# Altium PCB PCB1.PcbDoc (part 2 of 2)
Units mm, origin at the board's own origin, x right, y up, seen from the top; angles counter-clockwise.
Board outline 70 x 50 mm, 4 copper layers (Top Layer, Layer 1, Layer 2, Bottom Layer), stack 1.571 mm thick; 129 components, 87 nets, 486 pads, 124 vias.
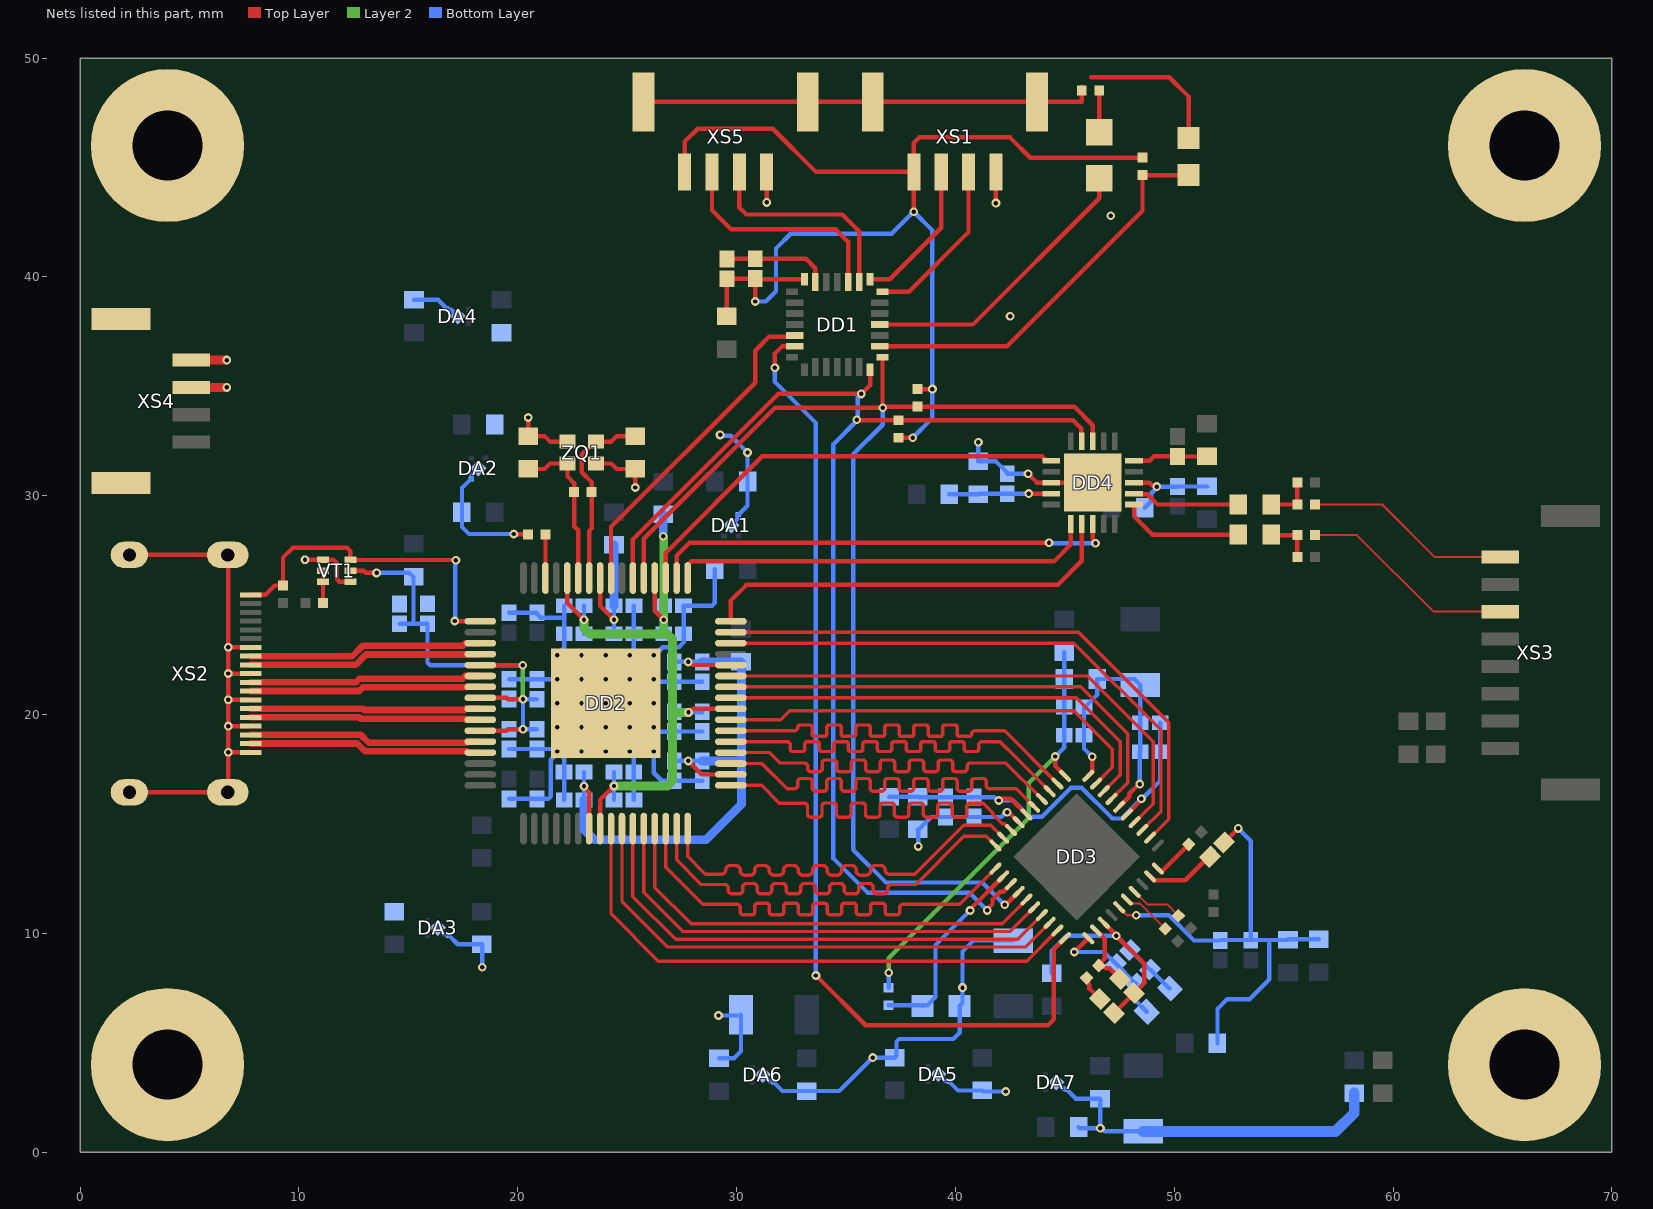
[diagram p4: the nets of this part, all layers, seen from the top]

## Via types
v1: diameter 0.4, hole 0.2, Top Layer to Bottom Layer, tented both sides, 80 vias
v2: diameter 0.5, hole 0.2, Top Layer to Bottom Layer, tented bottom, 41 vias
v3: diameter 0.4, hole 0.2, Top Layer to Bottom Layer, 3 vias

## Nets (pads, with @x,y where several pads share a name; then routed paths per layer and width w, separated by ;. In a path a pad name is that pad's centre, name@x,y a point inside that pad or via, vN(x,y) a via of type N, cw(c..) or ccw(c..) an arc to the next point about the centre after c; other vN are vias at no path point) (continued)
DGND1: C3.1 C4.1 C5.1 C6.1 C7.1 C8.1 C9.1 C10.1 C11.1 C12.1 C13.1 C14.1 C15.1 C16.1 C17.1 C18.1 C19.1 C20.1 C21.1 C22.1 C23.1 C24.1 C25.1 C26.1 C27.1 C28.1 C29.1 C30.1 C31.1 C32.1 C33.1 C34.1 C35.1 C36.1 C37.1 C38.1 C39.1 C40.1 C41.1 C42.1 C43.1 C44.1 C45.1 C46.1 C47.1 C48.1 C49.1 C50.1 C52.1 C53.1 C54.1 C56.1 C57.1 C58.1 C59.1 C61.1 C62.1 C67.1 C72.1 C75.1 C76.1 DA1.2 DA1.5 DA2.2 DA2.5 DA3.2 DA3.5 DA4.2 DA4.5 DA5.2 DA5.5 DA6.2 DA6.5 DA7.2 DA7.5 DD1.6 DD2.65 DD3.7 DD3.21 DD3.36 DD3.40 DD4.3 DD4.21 L14.2 pad.78 pad.80 R2.2 R6.1 SB1.1 SB2.1 VT1.1 VT1.4 XS1.1 XS1.M XS2.1 XS2.4 XS2.7 XS2.10 XS2.13 XS2.Shell XS4.1 XS4.2 XS4.M XS5.1 XS5.M ZQ1.2 ZQ1.4 | length 197.4
  Top Layer w0.2: XS2.Shell@2.25,16.449 XS2.Shell@6.75,16.449 6.775,16.474 pad.78@6.775,18.275 pad.78@6.775,19.475 pad.78@6.775,20.675 pad.78@6.775,21.875 ; XS2.Shell@2.25,27.299 XS2.Shell@6.75,27.299 6.775,27.274 pad.78@6.775,23.075 ; pad.78@6.775,18.274 XS2.1@7.799,18.274 ; pad.78@6.775,19.475 XS2.4@7.8,19.474 ; pad.78@6.775,20.675 XS2.7@7.799,20.675 ; XS2.10@7.8,21.874 pad.78@6.775,21.875 ; XS2.13@7.8,23.074 pad.78@6.775,23.075 ; pad.78@10.275,27.075 VT1.1@11.1,27.075 11.575,27.075 11.725,26.925 11.725,26.2 11.85,26.075 VT1.4@12.35,26.075 ; pad.78@19.825,28.25 19.837,28.238 20.462,28.238 R6.1@20.475,28.225 ; pad.78@20.475,33.575 C44.1@20.475,32.725 21.225,32.725 21.475,32.475 ZQ1.2@22.275,32.475 ; ZQ1.4@23.575,31.475 24.275,31.475 24.525,31.225 C40.1@25.375,31.225 pad.78@25.375,30.375 ; XS5.M@25.75,48 XS5.M@33.25,48 XS1.M@36.225,48 XS1.M@43.725,48 43.731,48.006 45.773,48.006 R2.2@45.773,48.698 ; C3.1@29.559,40.824 29.567,40.832 C10.1@30.85,40.832 30.857,40.825 33.169,40.825 33.6,40.394 DD1.6@33.6,39.768 ; v1(31.375,43.404) XS5.1@31.375,44.3 ; XS5.1@31.375,44.8 XS5.1@31.375,44.3 ; XS5.1@31.575,44.783 31.375,44.583 XS5.1@31.375,44.3 ; v1(41.85,43.375) XS1.1@41.85,44.8 ; v1(42.361,15.536) 42.399,15.498 42.476,15.498 DD3.7@42.89,15.083 ; v1(43.321,31.004) 43.725,30.6 DD4.3@44.383,30.6 DD4.21@46.275,30.6 ; v1(45.425,9.15) 45.434,9.15 46.068,9.784 DD3.21@46.072,9.78 ; DD3.40@46.072,17.204 46.249,17.381 v1(46.249,18.074) ; 46.2,49.125 49.775,49.125 50.655,48.245 SB1.1@50.655,46.354 ; DD3.36@47.486,15.79 47.946,16.25 47.946,16.379 48.392,16.825 v1(48.425,16.825) ; pad.78@6.775,21.875 pad.78@6.775,23.075
  Top Layer w0.4: XS4.2@5.075,34.95 v1(6.7,34.95) ; XS4.1@5.075,36.2 v1(6.7,36.2)
  Bottom Layer w0.2: C22.1@15.258,38.949 16.362,38.949 16.775,38.535 DA4.2@16.775,38.523 16.775,38.51 16.789,38.496 16.961,38.496 DA4.5@17.258,38.199 ; DA3.5@16.35,10.25 16.647,9.953 16.818,9.953 16.833,9.939 DA3.2@16.833,9.913 ; DA3.2@16.833,9.926 17.259,9.5 C21.1@18.35,9.5 ; DA2.5@18.201,31.253 17.905,30.956 17.905,30.785 17.89,30.771 17.865,30.771 17.451,30.357 C20.1@17.451,29.253 17.451,28.574 17.775,28.25 pad.78@19.825,28.25 ; v1(18.375,8.45) C21.1@18.375,9.475 ; C24.1@19.6,16.146 C31.1@20.875,16.146 21.394,16.146 21.511,16.264 21.511,17.932 21.813,18.233 v2(21.813,18.314) ; C6.1@19.6,18.425 C13.1@20.875,18.425 21.621,18.425 21.731,18.314 v2(21.813,18.314) ; C5.1@19.6,21.615 19.607,21.607 C12.1@20.875,21.607 20.882,21.614 v2(21.813,21.614) ; C30.1@19.6,24.65 20.871,24.65 C23.1@20.875,24.654 ; C23.1@20.875,24.607 21.054,24.428 22.121,24.428 ; v2(21.813,22.714) 21.813,22.755 22.121,23.064 22.121,24.428 ; C7.1@22.118,17.375 22.118,18.009 v2(21.813,18.314) ; C14.1@22.125,16.1 C7.1@22.125,17.346 ; C28.1@22.125,24.975 22.121,24.971 22.121,24.428 ; v2(25.113,18.314) 25.113,18.233 25.304,18.042 C32.1@25.304,17.375 25.304,16.104 C25.1@25.307,16.1 ; v2(25.113,22.714) 25.113,22.796 25.307,22.99 C36.1@25.307,23.7 C29.1@25.307,24.975 ; v2(26.213,18.314) 26.213,17.337 26.575,16.975 C8.1@27.15,16.975 C15.1@28.425,16.975 ; v2(26.213,19.414) 26.294,19.414 26.487,19.221 C33.1@27.15,19.221 27.154,19.225 C26.1@28.425,19.225 ; v2(26.213,21.614) 26.294,21.614 26.408,21.5 C9.1@27.15,21.5 C16.1@28.425,21.5 ; v2(26.213,22.714) 26.269,22.714 26.63,23.075 27.354,23.075 27.579,23.3 C34.1@27.579,23.7 C27.1@27.579,24.975 28.875,24.975 29,25.1 C75.1@29,26.65 ; v1(29.175,6.25) 30.176,6.25 C48.1@30.201,6.275 30.201,4.616 29.882,4.297 C38.1@29.2,4.297 ; v1(29.246,32.779) 29.284,32.741 29.734,32.741 v1(30.5,31.975) C76.1@30.5,30.65 30.5,29.546 30.087,29.133 30.061,29.133 30.047,29.118 30.047,28.947 DA1.5@29.75,28.65 ; DA6.5@31.2,3.547 31.497,3.25 31.668,3.25 31.683,3.236 31.683,3.21 32.096,2.797 C42.1@33.2,2.797 34.697,2.797 v1(36.225,4.325) 37.219,4.325 C37.1@37.222,4.322 37.308,4.408 37.308,5.058 37.425,5.175 39.9,5.175 40.194,5.469 SB2.1@40.194,6.69 40.325,6.821 v1(40.325,7.525) 40.325,9.175 40.824,9.674 C46.1@42.65,9.674 ; C52.1@38.275,14.75 38.3,14.725 v1(38.3,13.975) ; C52.1@38.325,14.75 38.896,15.321 C56.1@39.55,15.321 C61.1@40.85,15.321 42.092,15.321 42.307,15.536 v1(42.361,15.536) ; DA5.5@39.222,3.572 39.519,3.275 39.69,3.275 39.705,3.261 39.705,3.235 40.118,2.822 C41.1@41.222,2.822 41.269,2.775 v1(42.3,2.775) ; v1(41.05,32.45) C72.1@41.05,31.575 41.056,31.569 41.856,31.569 42.375,31.05 C67.1@42.375,31.004 v1(43.321,31.004) ; DA7.5@44.606,3.201 44.903,2.904 45.075,2.904 45.089,2.89 45.089,2.864 45.502,2.451 C43.1@46.606,2.451 46.625,2.432 v1(46.625,1.1) ; v1(45.425,9.15) 46.792,9.15 C59.1@47.334,8.609 48.234,7.709 C54.1@48.259,7.709 48.226,7.676 48.226,6.939 C50.1@48.745,6.42 ; C39.1@45.625,1.15 45.675,1.1 v1(46.625,1.1) ; v1(46.249,18.074) 45.879,18.444 C58.1@45.879,19.05 C53.1@45.879,20.35 45.925,20.35 46.475,20.9 C49.1@46.475,21.625 48.176,21.625 C45.1@48.45,21.351 C57.1@48.45,19.625 C62.1@48.45,18.3 48.425,18.275 v1(48.425,16.825) ; C47.1@48.575,0.951 46.828,0.951 46.679,1.1 v1(46.625,1.1)
  Bottom Layer w0.5: C47.1@48.575,0.951 57.376,0.951 58.225,1.8 L14.2@58.225,2.7
  other v2: 22.913,18.314 24.013,18.314 21.813,19.414 22.913,19.414 24.013,19.414 25.113,19.414 21.813,20.514 22.913,20.514 24.013,20.514 25.113,20.514 26.213,20.514 22.913,21.614 24.013,21.614 25.113,21.614 22.913,22.714 24.013,22.714
  other v3: 42.5,38.2 47.1,42.8
DVDD1: C25.2 C26.2 C27.2 C28.2 C32.2 C33.2 C34.2 C35.2 DD2.24 DD2.40 DD2.52 DD2.60 L7.1 | length 33.8
  Top Layer w0.2: DD2.60@22.263,26.239 22.263,25.102 v1(23.029,24.336) ; DD2.24@23.763,14.789 23.763,16.105 v1(24.396,16.739) ; DD2.52@26.263,26.239 26.263,24.746 v1(26.671,24.338) ; v1(27.802,20.1) 27.856,20.1 28.02,20.264 DD2.40@29.738,20.264
  Layer 2 w0.2: 26.625,23.684 26.671,23.73
  Layer 2 w0.4: v1(23.029,24.336) 23.029,23.946 23.291,23.684 26.625,23.684 26.841,23.684 27.075,23.449 27.075,20.1 ; v1(24.396,16.739) 26.841,16.739 27.075,16.974 27.075,20.1 ; v1(26.654,28.146) 26.671,28.129 v1(26.671,24.338) 26.671,23.73 ; v1(27.802,20.1) 27.075,20.1
  Bottom Layer w0.2: C35.2@23.029,23.7 v1(23.029,24.336) 23.029,24.971 C28.2@23.032,24.975 ; C32.2@24.396,17.375 v1(24.396,16.739) 24.396,16.104 C25.2@24.4,16.1 ; C34.2@26.671,23.7 v1(26.671,24.338) C27.2@26.671,24.975 ; C33.2@27.15,20.129 27.179,20.1 v1(27.802,20.1) 28.425,20.1 C26.2@28.425,20.132
  Bottom Layer w0.4: L7.1@26.65,29.15 26.654,29.146 v1(26.654,28.146)
DVDDIO1: C7.2 C8.2 C9.2 C14.2 C15.2 C16.2 DD2.23 DD2.34 DD2.44 L3.2 | length 29.6
  Top Layer w0.2: v1(23.029,16.727) 23.029,16.673 23.263,16.439 DD2.23@23.263,14.789 ; v1(27.787,17.882) 28.405,17.264 DD2.34@29.738,17.264 ; v1(27.787,22.407) 27.842,22.407 27.984,22.264 DD2.44@29.738,22.264
  Bottom Layer w0.2: C7.2@23.029,17.375 v1(23.029,16.727) 23.029,16.104 C14.2@23.032,16.1 ; C8.2@27.15,17.882 v1(27.787,17.882) C15.2@28.425,17.882 ; C9.2@27.15,22.407 v1(27.787,22.407) C16.2@28.425,22.407 ; 30.218,17.882 30.225,17.875
  Bottom Layer w0.4: C14.2@23.032,16.1 23.032,14.743 23.5,14.275 28.6,14.275 30.225,15.9 30.225,17.875 30.225,22.38 L3.2@30.197,22.407 C16.2@28.425,22.407 ; C15.2@28.425,17.882 30.218,17.882
"Hot Plug Detect / HEAC-": DD2.1 R7.2 VT1.6 XS2.19 | length 15.4
  Top Layer w0.2: XS2.19@7.8,25.474 8.474,25.474 8.9,25.9 R7.2@9.275,25.9 9.275,27.175 9.725,27.625 12.2,27.625 12.35,27.475 VT1.6@12.35,27.075 12.363,27.062 17.163,27.062 v1(17.175,27.05) ; v1(17.125,24.275) 17.13,24.27 18.282,24.27 DD2.1@18.288,24.264
  Bottom Layer w0.2: v1(17.125,24.275) 17.15,24.3 17.15,27.025 v1(17.175,27.05)
HS: DD2.46 DD3.33 | length 26.2
  Top Layer w0.154: DD2.46@29.738,23.264 45.417,23.264 49.397,19.284 49.397,15.58 DD3.33@48.547,14.729
I2C_SCL: DD1.22 DD2.53 DD3.14 DD4.18 R4.1 | length 57.7
  Top Layer w0.2: DD2.53@25.763,26.239 25.763,28.038 31.75,34.025 v1(36.675,34.025) ; DD1.22@36.67,36.325 36.67,34.117 36.724,34.063 R4.1@38.275,34.063 ; R4.1@38.275,34.075 45.425,34.075 46.275,33.225 DD4.18@46.275,32.492 ; v1(42.249,11.306) 42.295,11.306 DD3.14@42.89,11.901
  Bottom Layer w0.2: v1(36.675,34.025) 36.675,33.25 35.325,31.9 35.325,13.825 36.825,12.325 41.23,12.325 v1(42.249,11.306)
I2C_SDA: DD1.21 DD2.54 DD3.13 DD4.19 R3.1 | length 58.7
  Top Layer w0.2: DD2.54@25.263,26.239 25.263,28.013 31.904,34.654 v1(35.7,34.654) 36.1,35.054 DD1.21@36.1,35.755 ; v1(35.496,33.471) 35.521,33.446 45.379,33.446 45.748,33.077 45.748,32.519 DD4.19@45.775,32.492 ; v1(41.45,11.05) 41.45,11.104 41.695,11.349 41.695,11.553 42.046,11.904 42.186,11.904 DD3.13@42.537,12.255
  Bottom Layer w0.2: v1(35.496,33.471) 35.534,33.509 35.534,33.651 35.542,33.658 35.542,34.496 v1(35.7,34.654) ; v1@35.519,33.448 34.425,32.354 34.425,13.425 36,11.85 40.65,11.85 v1(41.45,11.05)
I2S: DD2.48 DD4.7 | length 19.4
  Top Layer w0.2: DD2.48@29.738,24.264 29.738,25.213 30.45,25.925 44.675,25.925 45.775,27.025 DD4.7@45.775,28.708
LED1: DD1.25 HL1.2 | length 13.3
  Top Layer w0.2: DD1.25@36.543,37.825 40.8,37.825 46.573,43.598 HL1.2@46.573,44.506
LLC: DD2.25 DD3.19 | length 25.8
  Top Layer w0.154: DD2.25@24.263,14.789 24.263,10.895 26.427,8.731 43.256,8.731 DD3.19@44.658,10.133
Lout: R16.2 XS3.6 | length 9.9
  Top Layer w0.09: R16.2@56.425,28.2 58.35,28.2 61.85,24.7 XS3.6@64.9,24.7
LRCLK: DD2.50 DD4.8 | length 21.3
  Top Layer w0.2: DD2.50@27.263,26.239 27.263,27.264 27.848,27.85 v1(44.275,27.85) ; DD4.8@46.275,28.708 46.275,28.004 46.4,27.879 v1(46.4,27.825)
  Bottom Layer w0.2: v1(44.275,27.85) 44.287,27.838 46.387,27.838 v1(46.4,27.825)
MCLK: DD2.51 DD4.1 | length 20.7
  Top Layer w0.2: DD2.51@26.763,26.239 26.763,27.388 31.177,31.802 43.959,31.802 44.076,31.685 44.076,31.627 44.103,31.6 DD4.1@44.383,31.6
MCU_VDD: C3.2 C10.2 DD1.7 L1.2 R1.1 R3.2 R4.2 XS1.4 XS5.4 | length 55.8
  Top Layer w0.2: XS5.4@27.625,44.8 27.625,46.175 28.225,46.775 31.65,46.775 33.625,44.8 XS1.4@38.1,44.8 ; L1.2@29.55,38.2 29.559,38.209 C3.2@29.559,39.917 29.567,39.925 C10.2@30.85,39.925 ; v1(30.85,38.875) C10.2@30.85,39.925 ; DD1.7@33.1,39.895 30.88,39.895 C10.2@30.85,39.925 ; R3.2@37.4,32.65 v1(38.05,32.65) ; v1(38.1,42.975) XS1.4@38.1,44.8 ; R4.2@38.275,34.875 v1(38.95,34.875) ; R1.1@48.55,45.45 43.425,45.45 42.5,46.375 38.35,46.375 38.1,46.125 XS1.4@38.1,44.8
  Bottom Layer w0.2: v1(30.85,38.875) 31.333,38.875 31.8,39.342 31.8,41.3 32.475,41.975 37.084,41.975 v1@38.084,42.975 ; v1(38.05,32.65) 38.95,33.55 v1(38.95,34.875) 38.95,42.125 v1(38.1,42.975)
NetC40_2: C40.2 DD2.58 R8.1 ZQ1.1 | length 8.7
  Top Layer w0.2: DD2.58@23.263,26.239 23.263,28.39 23.375,28.502 R8.1@23.375,30.175 23.375,30.625 22.925,31.075 22.925,31.875 23.525,32.475 ZQ1.1@23.575,32.475 24.275,32.475 24.525,32.725 C40.2@25.375,32.725
NetC44_2: C44.2 DD2.59 R8.2 ZQ1.3 | length 7.3
  Top Layer w0.2: C44.2@20.475,31.225 21.225,31.225 21.475,31.475 ZQ1.3@22.275,31.475 22.275,30.875 22.575,30.575 R8.2@22.575,30.175 22.575,28.612 22.763,28.424 DD2.59@22.763,26.239
NetC64_2: C64.2 DD3.29 | length 3.3
  Top Layer w0.2: DD3.29@48.901,12.608 49.084,12.425 50.5,12.425 51.579,13.504 C64.2@51.629,13.504
NetC65_1: C65.1 DD3.22 R10.1 | length 3.1
  Top Layer w0.2: DD3.22@46.426,10.133 46.819,9.74 46.819,8.849 46.564,8.593 R10.1@46.564,8.533 ; R10.1@46.558,8.533 46.735,8.533 46.864,8.403 47.047,8.403 C65.1@47.529,7.921
NetC66_1: C66.1 R10.2 | length 1.2
  Top Layer w0.2: R10.2@45.992,7.967 45.992,7.79 46.122,7.661 46.122,7.478 C66.1@46.604,6.996
NetC67_2: C67.2 C72.2 DD4.4 L13.1 | length 4.7
  Top Layer w0.2: v1(43.35,30.1) DD4.4@44.383,30.1
  Bottom Layer w0.2: L13.1@39.725,30.075 C72.2@41.05,30.075 41.071,30.096 C67.2@42.375,30.096 42.379,30.1 v1(43.35,30.1)
NetC68_1: C68.1 R16.1 R18.2 | length 2.2
  Top Layer w0.2: C68.1@54.425,28.225 54.45,28.2 R16.1@55.625,28.2 R18.2@55.625,27.2
NetC68_2: C68.2 DD4.11 | length 5.6
  Top Layer w0.2: DD4.11@48.167,29.6 48.167,29.058 49,28.225 C68.2@52.925,28.225
NetC69_1: C69.1 R17.1 R19.2 | length 2.2
  Top Layer w0.2: C69.1@54.425,29.6 R17.1@55.625,29.6 R19.2@55.625,30.6
NetC69_2: C69.2 DD4.12 | length 5
  Top Layer w0.2: DD4.12@48.167,30.1 48.194,30.073 48.763,30.073 49.236,29.6 C69.2@52.925,29.6
NetC70_1: C70.1 C73.1 DD4.15 | length 3.4
  Top Layer w0.2: DD4.15@48.167,31.6 48.874,31.6 49.074,31.8 50.146,31.8 C70.1@50.15,31.796 51.496,31.796 C73.1@51.5,31.8
NetC71_2: C71.2 C74.2 DD4.13 L12.1 | length 4.6
  Top Layer w0.2: DD4.13@48.167,30.6 48.874,30.6 49.016,30.457 49.162,30.457 v1(49.2,30.419)
  Bottom Layer w0.2: L12.1@48.65,29.45 48.95,29.75 48.95,30.115 49.2,30.365 v1(49.2,30.419) 50.144,30.419 C71.2@50.15,30.425 C74.2@51.5,30.425
NetDD3_12: DD3.12 R12.2 SB2.2 | length 9.1
  Top Layer w0.2: v1(40.671,11.046) 40.671,11.096 DD3.12@42.183,12.608
  Bottom Layer w0.2: R12.2@36.944,6.715 38.469,6.715 SB2.2@38.494,6.69 38.525,6.721 38.722,6.721 39.09,7.089 39.09,9.465 v1(40.671,11.046)
NetDD3_26: DD3.26 R11.2 | length 2.3
  Top Layer w0.09: DD3.26@47.84,11.547 48.017,11.371 48.429,11.371 R11.2@49.592,10.208
NetDD3_27: DD3.27 R14.2 | length 2.5
  Top Layer w0.09: DD3.27@48.193,11.901 48.769,11.325 49.675,11.325 R14.2@50.192,10.808
NetDD3_30: DD3.30 R9.1 | length 2
  Top Layer w0.2: DD3.30@49.254,12.962 49.408,12.808 R9.1@50.667,14.067
NetHL1_1: HL1.1 R2.1 | length 1.9
  Top Layer w0.2: HL1.1@46.573,46.606 R2.1@46.573,48.53
NetR5_1: R5.1 VT1.2 VT1.3 | length 1.5
  Top Layer w0.2: R5.1@11.1,25.1 VT1.3@11.1,26.075 VT1.2@11.1,26.575
P0: DD2.43 DD3.34 | length 24.6
  Top Layer w0.154: DD2.43@29.738,21.764 46.032,21.764 49.044,18.753 49.044,15.933 DD3.34@48.193,15.083
P1: DD2.42 DD3.37 | length 22.3
  Top Layer w0.154: DD2.42@29.738,21.264 45.737,21.264 47.88,19.121 47.88,16.891 DD3.37@47.133,16.144
P2: DD2.41 DD3.38 | length 21.2
  Top Layer w0.154: DD2.41@29.738,20.764 45.53,20.764 47.526,18.768 47.526,17.244 DD3.38@46.779,16.497
P3: DD2.39 DD3.39 | length 20.2
  Top Layer w0.154: DD2.39@29.738,19.764 32.028,19.764 32.435,20.172 45.415,20.172 47.173,18.414 47.173,17.598 DD3.39@46.426,16.851
P4: DD2.38 DD3.2 | length 20.9
  Top Layer w0.154: DD2.38@29.738,19.264 32.567,19.264 32.644,19.264 ccw(c32.644,19.418) 32.798,19.418 32.798,19.422 cw(c32.898,19.422) 32.898,19.522 33.361,19.522 cw(c33.361,19.422) 33.46,19.422 33.46,19.107 ccw(c33.56,19.107) 33.56,19.007 34.023,19.007 ccw(c34.023,19.107) 34.122,19.107 34.122,19.422 cw(c34.222,19.422) 34.222,19.522 34.685,19.522 cw(c34.685,19.422) 34.784,19.422 34.784,19.107 ccw(c34.884,19.107) 34.884,19.007 35.347,19.007 ccw(c35.347,19.107) 35.446,19.107 35.446,19.422 cw(c35.546,19.422) 35.546,19.522 36.009,19.522 cw(c36.009,19.422) 36.108,19.422 36.108,19.107 ccw(c36.208,19.107) 36.208,19.007 36.671,19.007 ccw(c36.671,19.107) 36.77,19.107 36.77,19.422 cw(c36.87,19.422) 36.87,19.522 37.333,19.522 cw(c37.333,19.422) 37.432,19.422 37.432,19.107 ccw(c37.532,19.107) 37.532,19.007 37.995,19.007 ccw(c37.995,19.107) 38.094,19.107 38.094,19.422 cw(c38.193,19.422) 38.193,19.522 38.657,19.522 cw(c38.657,19.422) 38.756,19.422 38.756,19.107 ccw(c38.855,19.107) 38.855,19.007 39.319,19.007 ccw(c39.319,19.107) 39.418,19.107 39.418,19.422 cw(c39.517,19.422) 39.517,19.522 39.981,19.522 cw(c39.981,19.422) 40.08,19.422 40.08,19.107 ccw(c40.179,19.107) 40.179,19.007 40.643,19.007 ccw(c40.643,19.107) 40.742,19.107 40.742,19.11 cw(c40.896,19.11) 40.896,19.264 41.3,19.264 42.244,19.264 DD3.2@44.658,16.851
P5: DD2.37 DD3.3 | length 20.5
  Top Layer w0.154: DD2.37@29.738,18.764 31.567,18.764 32.306,18.764 cw(c32.306,18.61) 32.46,18.61 32.46,18.415 ccw(c32.559,18.415) 32.559,18.316 33.023,18.316 ccw(c33.023,18.415) 33.122,18.415 33.122,18.665 cw(c33.221,18.665) 33.221,18.764 33.685,18.764 cw(c33.685,18.665) 33.784,18.665 33.784,18.415 ccw(c33.883,18.415) 33.883,18.316 34.346,18.316 ccw(c34.346,18.415) 34.446,18.415 34.446,18.665 cw(c34.545,18.665) 34.545,18.764 35.008,18.764 cw(c35.008,18.665) 35.108,18.665 35.108,18.415 ccw(c35.207,18.415) 35.207,18.316 35.67,18.316 ccw(c35.67,18.415) 35.77,18.415 35.77,18.665 cw(c35.869,18.665) 35.869,18.764 36.332,18.764 cw(c36.332,18.665) 36.432,18.665 36.432,18.415 ccw(c36.531,18.415) 36.531,18.316 36.994,18.316 ccw(c36.994,18.415) 37.094,18.415 37.094,18.665 cw(c37.193,18.665) 37.193,18.764 37.656,18.764 cw(c37.656,18.665) 37.756,18.665 37.756,18.415 ccw(c37.855,18.415) 37.855,18.316 38.318,18.316 ccw(c38.318,18.415) 38.418,18.415 38.418,18.665 cw(c38.517,18.665) 38.517,18.764 38.98,18.764 cw(c38.98,18.665) 39.08,18.665 39.08,18.415 ccw(c39.179,18.415) 39.179,18.316 39.642,18.316 ccw(c39.642,18.415) 39.742,18.415 39.742,18.665 cw(c39.841,18.665) 39.841,18.764 40.304,18.764 cw(c40.304,18.665) 40.404,18.665 40.404,18.415 ccw(c40.503,18.415) 40.503,18.316 40.966,18.316 ccw(c40.966,18.415) 41.066,18.415 41.066,18.61 cw(c41.22,18.61) 41.22,18.764 41.964,18.764 42.037,18.764 42.819,17.983 DD3.3@44.304,16.497
P6: DD2.36 DD3.4 | length 19.8
  Top Layer w0.154: DD2.36@29.738,18.264 31.524,18.264 32.004,17.785 32.359,17.785 33.098,17.785 cw(c33.098,17.631) 33.252,17.631 33.252,17.522 ccw(c33.385,17.522) 33.385,17.39 33.782,17.39 ccw(c33.782,17.522) 33.914,17.522 33.914,17.792 cw(c34.047,17.792) 34.047,17.924 34.444,17.924 cw(c34.444,17.792) 34.576,17.792 34.576,17.522 ccw(c34.709,17.522) 34.709,17.39 35.106,17.39 ccw(c35.106,17.522) 35.238,17.522 35.238,17.792 cw(c35.37,17.792) 35.37,17.924 35.768,17.924 cw(c35.768,17.792) 35.9,17.792 35.9,17.522 ccw(c36.032,17.522) 36.032,17.39 36.43,17.39 ccw(c36.43,17.522) 36.562,17.522 36.562,17.792 cw(c36.694,17.792) 36.694,17.924 37.092,17.924 cw(c37.092,17.792) 37.224,17.792 37.224,17.522 ccw(c37.356,17.522) 37.356,17.39 37.754,17.39 ccw(c37.754,17.522) 37.886,17.522 37.886,17.792 cw(c38.018,17.792) 38.018,17.924 38.416,17.924 cw(c38.416,17.792) 38.548,17.792 38.548,17.522 ccw(c38.68,17.522) 38.68,17.39 39.078,17.39 ccw(c39.078,17.522) 39.21,17.522 39.21,17.792 cw(c39.342,17.792) 39.342,17.924 39.74,17.924 cw(c39.74,17.792) 39.872,17.792 39.872,17.522 ccw(c40.004,17.522) 40.004,17.39 40.402,17.39 ccw(c40.402,17.522) 40.534,17.522 40.534,17.631 cw(c40.688,17.631) 40.688,17.785 42.008,17.785 42.31,17.785 DD3.4@43.951,16.144
P7: DD2.35 DD3.5 | length 20.9
  Top Layer w0.154: DD2.35@29.738,17.764 31.16,17.764 32.308,16.616 32.566,16.616 32.643,16.616 ccw(c32.643,16.77) 32.797,16.77 32.797,16.946 cw(c32.929,16.946) 32.929,17.078 33.327,17.078 cw(c33.327,16.946) 33.459,16.946 33.459,16.633 ccw(c33.591,16.633) 33.591,16.5 33.989,16.5 ccw(c33.989,16.633) 34.121,16.633 34.121,16.946 cw(c34.253,16.946) 34.253,17.078 34.651,17.078 cw(c34.651,16.946) 34.783,16.946 34.783,16.633 ccw(c34.915,16.633) 34.915,16.5 35.312,16.5 ccw(c35.312,16.633) 35.445,16.633 35.445,16.946 cw(c35.577,16.946) 35.577,17.078 35.974,17.078 cw(c35.974,16.946) 36.107,16.946 36.107,16.633 ccw(c36.239,16.633) 36.239,16.5 36.636,16.5 ccw(c36.636,16.633) 36.769,16.633 36.769,16.946 cw(c36.901,16.946) 36.901,17.078 37.298,17.078 cw(c37.298,16.946) 37.431,16.946 37.431,16.633 ccw(c37.563,16.633) 37.563,16.5 37.96,16.5 ccw(c37.96,16.633) 38.093,16.633 38.093,16.946 cw(c38.225,16.946) 38.225,17.078 38.622,17.078 cw(c38.622,16.946) 38.755,16.946 38.755,16.633 ccw(c38.887,16.633) 38.887,16.5 39.284,16.5 ccw(c39.284,16.633) 39.417,16.633 39.417,16.946 cw(c39.549,16.946) 39.549,17.078 39.946,17.078 cw(c39.946,16.946) 40.079,16.946 40.079,16.633 ccw(c40.211,16.633) 40.211,16.5 40.608,16.5 ccw(c40.608,16.633) 40.741,16.633 40.741,16.946 cw(c40.873,16.946) 40.873,17.078 41.27,17.078 cw(c41.27,16.946) 41.403,16.946 41.403,16.77 ccw(c41.557,16.77) 41.557,16.616 42.015,16.616 42.771,16.616 DD3.5@43.597,15.79
P8: DD2.33 DD3.8 | length 20
  Top Layer w0.154: DD2.33@29.738,16.764 31.144,16.764 31.953,15.956 32.348,15.956 33.087,15.956 cw(c33.087,15.802) 33.241,15.802 33.241,15.449 ccw(c33.373,15.449) 33.373,15.317 33.771,15.317 ccw(c33.771,15.449) 33.903,15.449 33.903,15.825 cw(c34.035,15.825) 34.035,15.957 34.433,15.957 cw(c34.433,15.825) 34.565,15.825 34.565,15.449 ccw(c34.697,15.449) 34.697,15.317 35.095,15.317 ccw(c35.095,15.449) 35.227,15.449 35.227,15.825 cw(c35.359,15.825) 35.359,15.957 35.757,15.957 cw(c35.757,15.825) 35.889,15.825 35.889,15.449 ccw(c36.021,15.449) 36.021,15.317 36.419,15.317 ccw(c36.419,15.449) 36.551,15.449 36.551,15.825 cw(c36.683,15.825) 36.683,15.957 37.081,15.957 cw(c37.081,15.825) 37.213,15.825 37.213,15.449 ccw(c37.345,15.449) 37.345,15.317 37.743,15.317 ccw(c37.743,15.449) 37.875,15.449 37.875,15.825 cw(c38.007,15.825) 38.007,15.957 38.404,15.957 cw(c38.404,15.825) 38.537,15.825 38.537,15.449 ccw(c38.669,15.449) 38.669,15.317 39.066,15.317 ccw(c39.066,15.449) 39.199,15.449 39.199,15.825 cw(c39.331,15.825) 39.331,15.957 39.728,15.957 cw(c39.728,15.825) 39.861,15.825 39.861,15.449 ccw(c39.993,15.449) 39.993,15.317 40.39,15.317 ccw(c40.39,15.449) 40.523,15.449 40.523,15.802 cw(c40.677,15.802) 40.677,15.956 41.277,15.956 41.709,15.524 41.709,15.437 42.141,15.005 42.249,15.005 42.524,14.729 DD3.8@42.537,14.729
P9: DD2.32 DD3.9 | length 20.3
  Top Layer w0.154: DD2.32@27.763,14.789 27.763,13.517 28.481,12.798 28.575,12.705 29.305,12.705 ccw(c29.305,12.903) 29.504,12.903 ; 29.504,12.904 cw(c29.702,12.904) 29.702,13.103 29.967,13.103 cw(c29.967,12.904) 30.166,12.904 30.166,12.863 ccw(c30.364,12.863) 30.364,12.665 30.629,12.665 ccw(c30.629,12.863) 30.828,12.863 30.828,12.904 cw(c31.026,12.904) 31.026,13.103 31.291,13.103 cw(c31.291,12.904) 31.49,12.904 31.49,12.863 ccw(c31.688,12.863) 31.688,12.665 31.953,12.665 ccw(c31.953,12.863) 32.152,12.863 32.152,12.904 cw(c32.35,12.904) 32.35,13.103 32.615,13.103 cw(c32.615,12.904) 32.814,12.904 32.814,12.863 ccw(c33.012,12.863) 33.012,12.665 33.277,12.665 ccw(c33.277,12.863) 33.476,12.863 33.476,12.904 cw(c33.674,12.904) 33.674,13.103 33.939,13.103 cw(c33.939,12.904) 34.138,12.904 34.138,12.863 ccw(c34.336,12.863) 34.336,12.665 34.601,12.665 ccw(c34.601,12.863) 34.8,12.863 34.8,12.904 cw(c34.998,12.904) 34.998,13.103 35.263,13.103 cw(c35.263,12.904) 35.462,12.904 35.462,12.863 ccw(c35.66,12.863) 35.66,12.665 35.925,12.665 ccw(c35.925,12.863) 36.124,12.863 36.124,12.904 cw(c36.322,12.904) 36.322,13.103 36.587,13.103 cw(c36.587,12.904) 36.786,12.904 ; 36.786,12.903 ccw(c36.984,12.903) 36.984,12.705 37.723,12.705 38.15,12.705 40.386,14.94 41.619,14.94 DD3.9@42.183,14.376
P10: DD2.31 DD3.10 | length 21.4
  Top Layer w0.154: DD2.31@27.263,14.789 27.263,13.365 28.394,12.233 28.824,12.233 29.453,12.233 cw(c29.453,12.068) 29.619,12.068 29.619,11.973 ccw(c29.784,11.973) 29.784,11.807 30.115,11.807 ccw(c30.115,11.973) 30.281,11.973 30.281,12.114 cw(c30.446,12.114) 30.446,12.279 30.777,12.279 cw(c30.777,12.114) 30.943,12.114 30.943,11.973 ccw(c31.108,11.973) 31.108,11.807 31.439,11.807 ccw(c31.439,11.973) 31.605,11.973 31.605,12.114 cw(c31.77,12.114) 31.77,12.279 32.101,12.279 cw(c32.101,12.114) 32.267,12.114 32.267,11.973 ccw(c32.432,11.973) 32.432,11.807 32.763,11.807 ccw(c32.763,11.973) 32.929,11.973 32.929,12.114 cw(c33.094,12.114) 33.094,12.279 33.425,12.279 cw(c33.425,12.114) 33.591,12.114 33.591,11.973 ccw(c33.756,11.973) 33.756,11.807 34.087,11.807 ccw(c34.087,11.973) 34.253,11.973 34.253,12.114 cw(c34.418,12.114) 34.418,12.279 34.749,12.279 cw(c34.749,12.114) 34.915,12.114 34.915,11.973 ccw(c35.08,11.973) 35.08,11.807 35.411,11.807 ccw(c35.411,11.973) 35.577,11.973 35.577,12.114 cw(c35.742,12.114) 35.742,12.279 36.073,12.279 cw(c36.073,12.114) 36.238,12.114 36.238,11.973 ccw(c36.404,11.973) 36.404,11.807 36.735,11.807 ccw(c36.735,11.973) 36.9,11.973 36.9,12.068 cw(c37.066,12.068) 37.066,12.233 37.143,12.233 38.179,12.233 40.386,14.44 41.412,14.44 DD3.10@41.829,14.022
P11: DD2.30 DD3.11 | length 23.1
  Top Layer w0.154: DD2.30@26.763,14.789 26.763,13.018 28.448,11.333 28.711,11.333 30.017,11.333 cw(c30.017,11.179) 30.171,11.179 30.171,10.984 ccw(c30.304,10.984) 30.304,10.852 30.701,10.852 ccw(c30.701,10.984) 30.833,10.984 30.833,11.25 cw(c30.966,11.25) 30.966,11.382 31.363,11.382 cw(c31.363,11.25) 31.495,11.25 31.495,10.984 ccw(c31.628,10.984) 31.628,10.852 32.025,10.852 ccw(c32.025,10.984) 32.157,10.984 32.157,11.25 cw(c32.289,11.25) 32.289,11.382 32.687,11.382 cw(c32.687,11.25) 32.819,11.25 32.819,10.984 ccw(c32.951,10.984) 32.951,10.852 33.349,10.852 ccw(c33.349,10.984) 33.481,10.984 33.481,11.25 cw(c33.613,11.25) 33.613,11.382 34.011,11.382 cw(c34.011,11.25) 34.143,11.25 34.143,10.984 ccw(c34.275,10.984) 34.275,10.852 34.673,10.852 ccw(c34.673,10.984) 34.805,10.984 34.805,11.25 cw(c34.937,11.25) 34.937,11.382 35.335,11.382 cw(c35.335,11.25) 35.467,11.25 35.467,10.984 ccw(c35.599,10.984) 35.599,10.852 35.997,10.852 ccw(c35.997,10.984) 36.129,10.984 36.129,11.25 cw(c36.261,11.25) 36.261,11.382 36.659,11.382 cw(c36.659,11.25) 36.791,11.25 36.791,10.984 ccw(c36.923,10.984) 36.923,10.852 37.321,10.852 ccw(c37.321,10.984) 37.453,10.984 37.453,11.179 cw(c37.607,11.179) 37.607,11.333 37.684,11.333 40.201,11.333 DD3.11@41.829,12.962
P12: DD2.29 DD3.15 | length 20.8
  Top Layer w0.154: DD2.29@26.263,14.789 26.263,12.096 27.92,10.438 42.135,10.438 DD3.15@43.244,11.547
P13: DD2.28 DD3.16 | length 21.9
  Top Layer w0.154: DD2.28@25.763,14.789 25.763,11.888 27.566,10.085 42.488,10.085 DD3.16@43.597,11.194
P14: DD2.27 DD3.17 | length 23.1
  Top Layer w0.154: DD2.27@25.263,14.789 25.263,11.681 27.213,9.731 42.842,9.731 DD3.17@43.951,10.84
P15: DD2.26 DD3.18 | length 24.2
  Top Layer w0.154: DD2.26@24.763,14.789 24.763,11.474 26.859,9.378 43.195,9.378 DD3.18@44.304,10.487
PVDD1: C29.2 C36.2 DD2.57 L5.1 | length 6.2
  Top Layer w0.2: DD2.57@23.763,26.239 23.763,24.975 v1(24.4,24.338)
  Bottom Layer w0.2: C36.2@24.4,23.7 v1(24.4,24.338) C29.2@24.4,24.975
  Bottom Layer w0.4: C29.2@24.4,24.975 L5.1@24.4,27.75
PVDD2: C50.2 C54.2 C59.2 C65.2 C66.2 DD3.23 L9.2 | length 13.2
  Top Layer w0.2: DD3.23@46.779,10.487 47.352,9.914 v1(47.352,9.89) ; C66.2@47.246,6.354 C65.2@48.171,7.279 48.625,7.734 48.625,8.625 v1@47.375,9.875
  Bottom Layer w0.2: L9.2@44.4,8.175 44.4,9.2 45.09,9.89 v1(47.352,9.89) 47.975,9.267 C59.2@47.975,9.25 48.875,8.35 C54.2@48.9,8.35 49.77,7.48 C50.2@49.805,7.48
RESET_ADV7393: DD1.13 DD3.20 | length 46.1
  Top Layer w0.2: v1(31.75,35.85) 31.75,36.5 32.074,36.824 DD1.13@32.657,36.825 ; v1(33.625,8.075) 35.9,5.8 44.225,5.8 44.5,6.075 44.5,9.268 DD3.20@45.011,9.78
  Bottom Layer w0.2: v1(31.75,35.85) 31.75,35.2 33.625,33.325 v1(33.625,8.075)
RESET_ADV7611: DD1.12 DD2.56 | length 15.2
  Top Layer w0.2: DD2.56@24.263,26.239 24.263,28.58 30.85,35.167 30.85,36.625 31.498,37.273 32.604,37.273 DD1.12@32.657,37.325
Rout: R17.2 XS3.8 | length 9.5
  Top Layer w0.09: R17.2@56.425,29.6 59.5,29.6 61.9,27.2 XS3.8@64.9,27.2
SCL: DD2.62 R6.2 | length 2
  Top Layer w0.2: DD2.62@21.263,26.239 21.269,26.246 21.269,28.219 R6.2@21.275,28.225
SCLK: DD2.49 DD4.6 | length 19.4
  Top Layer w0.2: DD2.49@27.763,26.239 27.763,26.833 27.93,27 44.5,27 45.275,27.775 DD4.6@45.275,28.708
Select: DD1.23 R1.2 SB1.2 | length 18.3
  Top Layer w0.2: DD1.23@36.543,36.825 42.35,36.825 48.55,43.025 R1.2@48.55,44.65 50.651,44.65 SB1.2@50.655,44.654
SR_reset: DD1.1 XS1.3 | length 6.8
  Top Layer w0.2: DD1.1@36.1,39.895 36.995,39.895 39.35,42.25 XS1.3@39.35,44.8
SWIM: DD1.28 XS1.2 | length 7.8
  Top Layer w0.2: DD1.28@36.67,39.325 37.875,39.325 40.6,42.05 XS1.2@40.6,44.8
"TMDS Clock_N": DD2.3 XS2.12 | length 10.7
  Top Layer w0.3: XS2.12@7.8,22.674 7.805,22.669 12.44,22.669 12.908,23.136 17.481,23.136 17.609,23.264 DD2.3@18.288,23.264
"TMDS Clock_P": DD2.4 XS2.11 | length 10.7
  Top Layer w0.3: XS2.11@7.8,22.274 7.805,22.279 12.602,22.279 13.069,22.746 17.642,22.746 17.66,22.764 DD2.4@18.288,22.764
"TMDS Data0_N": DD2.6 XS2.9 | length 10.6
  Top Layer w0.3: XS2.9@7.8,21.474 7.805,21.469 12.593,21.469 12.76,21.636 17.481,21.636 17.609,21.764 DD2.6@18.288,21.764
"TMDS Data0_P": DD2.7 XS2.8 | length 10.6
  Top Layer w0.3: XS2.8@7.8,21.074 7.805,21.079 12.754,21.079 12.922,21.246 17.642,21.246 17.66,21.264 DD2.7@18.288,21.264
"TMDS Data1_N": DD2.9 XS2.6 | length 10.5
  Top Layer w0.3: XS2.6@7.8,20.274 7.808,20.266 8.415,20.266 8.42,20.261 12.927,20.261 12.979,20.209 17.554,20.209 17.609,20.264 DD2.9@18.288,20.264
"TMDS Data1_P": DD2.10 XS2.5 | length 10.5
  Top Layer w0.3: XS2.5@7.8,19.874 7.803,19.871 12.766,19.871 12.818,19.819 17.554,19.819 17.609,19.764 DD2.10@18.288,19.764
"TMDS Data2_N": DD2.12 XS2.3 | length 10.7
  Top Layer w0.3: XS2.3@7.8,19.074 7.805,19.069 12.831,19.069 13.19,18.709 17.658,18.709 17.713,18.764 DD2.12@18.288,18.764
"TMDS Data2_P": DD2.13 XS2.2 | length 10.7
  Top Layer w0.3: XS2.2@7.8,18.674 7.805,18.679 12.669,18.679 13.029,18.319 17.658,18.319 17.713,18.264 DD2.13@18.288,18.264
TVDD1: C4.2 C5.2 C6.2 C11.2 C12.2 C13.2 DD2.5 DD2.8 DD2.11 L2.2 VT1.5 | length 24
  Top Layer w0.2: VT1.5@12.35,26.575 12.95,26.575 13.05,26.475 v1(13.55,26.475) ; DD2.11@18.288,19.264 19.484,19.264 19.551,19.332 v1(20.238,19.332) ; DD2.8@18.288,20.764 19.487,20.764 19.551,20.7 v1(20.241,20.7) ; DD2.5@18.288,22.264 18.295,22.257 20.218,22.257 v1(20.225,22.25)
  Layer 2 w0.2: v1(20.225,22.25) 20.233,22.242 20.233,20.708 v1(20.241,20.7)
  Bottom Layer w0.2: v1(13.55,26.475) 15.046,26.475 15.236,26.286 15.236,24.15 ; C4.2@14.6,24.15 15.236,24.15 ; C6.2@19.6,19.332 v1(20.238,19.332) ; C5.2@19.6,20.707 19.607,20.7 v1(20.241,20.7) ; v1(20.225,22.25) 16,22.25 15.875,22.375 C11.2@15.875,24.154 15.871,24.15 15.236,24.15 ; C13.2@20.875,19.332 v1(20.238,19.332) ; C12.2@20.875,20.7 v1(20.241,20.7) ; v1(20.238,19.332) 20.239,19.333 20.239,20.698 v1(20.241,20.7)
UART1_RX: DD1.3 XS5.3 | length 10.4
  Top Layer w0.2: XS5.3@28.875,44.8 28.875,43.05 29.75,42.175 34.525,42.175 35.1,41.6 DD1.3@35.1,39.768
UART1_TX: DD1.2 XS5.2 | length 9.9
  Top Layer w0.2: XS5.2@30.125,44.8 30.125,43.175 30.45,42.85 34.825,42.85 35.6,42.075 DD1.2@35.6,39.768
VAA: C51.2 C55.2 C60.2 C63.2 C64.1 DD3.25 L10.2 | length 22.3
  Top Layer w0.102: DD3.25@47.486,11.194 47.846,10.834 48.26,10.834 v1(48.265,10.829)
  Top Layer w0.2: C64.1@52.271,14.146 v1(52.925,14.8)
  Bottom Layer w0.2: v1(48.265,10.829) 49.754,10.829 50.905,9.679 C60.2@52.1,9.679 52.121,9.7 C55.2@53.5,9.7 ; L10.2@51.975,4.975 51.975,6.55 52.425,7 53.45,7 54.35,7.9 54.35,9.7 ; v1(52.925,14.8) 53.5,14.225 C55.2@53.5,9.7 ; C63.2@55.2,9.7 54.35,9.7 ; C63.2@55.2,9.725 C51.2@56.6,9.725 ; C55.2@53.5,9.7 54.35,9.7
VDD1: C52.2 C56.2 C57.2 C61.2 C62.2 DD3.6 DD3.35 L11.2 | length 19.9
  Top Layer w0.2: v1(41.975,16.075) 42.029,16.075 42.108,16.154 42.526,16.154 DD3.6@43.244,15.437 ; DD3.35@47.84,15.437 48.5,16.097 v1(48.5,16.15)
  Bottom Layer w0.2: L11.2@36.975,16.25 C52.2@38.275,16.25 38.296,16.229 C56.2@39.55,16.229 C61.2@40.85,16.229 41.767,16.229 41.921,16.075 v1(41.975,16.075) 41.99,16.09 42.634,16.09 43.391,15.333 43.958,15.333 45.275,16.65 45.775,16.65 47.175,15.25 47.6,15.25 v1(48.5,16.15) 48.533,16.15 49.35,16.967 49.35,18.293 C62.2@49.357,18.3 C57.2@49.357,19.625
VDD_IO: C49.2 C53.2 C58.2 DD3.1 L8.2 R12.1 | length 19.7
  Top Layer w0.2: v1(44.563,18.087) 44.563,17.653 DD3.1@45.011,17.204
  Layer 2 w0.2: v3(36.95,8.2) 36.95,8.875 43.35,15.275 43.35,16.873 v1(44.563,18.087)
  Bottom Layer w0.2: R12.1@36.944,7.515 36.947,7.518 36.947,8.197 v3(36.95,8.2) ; v1(44.563,18.087) 44.971,18.495 C58.2@44.971,19.05 C53.2@44.971,20.35 44.971,21.621 C49.2@44.975,21.625 L8.2@44.975,22.85
VS: DD2.47 DD3.32 | length 27.3
  Top Layer w0.154: DD2.47@29.738,23.764 45.624,23.764 49.751,19.638 49.751,15.226 DD3.32@48.901,14.376
pads on no net: DD1.4 DD1.5 DD1.8 DD1.9 DD1.10 DD1.11 DD1.14 DD1.15 DD1.16 DD1.17 DD1.18 DD1.19 DD1.20 DD1.24 DD1.26 DD1.27 DD2.15 DD2.16 DD2.17 DD2.18 DD2.19 DD2.20 DD2.21 DD2.22 DD2.45 DD2.55 DD2.63 DD3.31 DD4.2 DD4.5 DD4.9 DD4.10 DD4.16 DD4.17 DD4.20 XS2.15 XS2.16 XS2.17

## Polygon pours and split planes (outlines as drawn)
DGND1 on Bottom Layer "NONET_L-01_P-001" (solid, remove dead copper, pour order 6): 70,50 0,50 0,0 70,0
AGND on Bottom Layer "NONET_L-01_P-001" (solid, remove dead copper, pour order 1): 70,36.75 50.25,36.75 47.75,34.25 47.75,27.5 50.5,24.75 50.5,14.5 49.4,13.4 48.6,13.4 45.6,16.4 45.5,16.4 42.6,13.5 45.55,10.55 46.4,11.4 47.5,10.3 48.4,10.3 51.2,7.5 51.2,4.1 51.9,3.4 61.5,3.4 61.5,6.2 63.6,8.3 70,8.3
DGND1 on Layer 2 "NONET_L-01_P-001" (solid, remove dead copper, pour order 9): 70,50 0,50 0,0 70,0
AGND on Layer 2 "NONET_L-01_P-001" (solid, remove dead copper, pour order 8): 70,36.75 50.25,36.75 47.75,34.25 47.75,27.5 50.5,24.75 50.5,14.5 49.4,13.4 48.6,13.4 45.6,16.4 45.5,16.4 42.6,13.5 45.55,10.55 46.4,11.4 47.5,10.3 48.4,10.3 51.2,7.5 51.2,4.1 51.9,3.4 61.5,3.4 61.5,6.2 63.6,8.3 70,8.3
DGND1 on Layer 1 "NONET_L-01_P-001" (solid, remove dead copper, pour order 7): 70,50 0,50 0,0 70,0
AGND on Layer 1 "AGND_L02_P002" (solid, remove dead copper, pour order 2): 70,36.75 50.25,36.75 47.75,34.25 47.75,27.5 50.5,24.75 50.5,14.5 49.4,13.4 48.6,13.4 45.6,16.4 45.5,16.4 42.6,13.5 45.55,10.55 46.4,11.4 47.5,10.3 48.4,10.3 51.2,7.5 51.2,4.1 51.9,3.4 61.5,3.4 61.5,6.2 63.6,8.3 70,8.3
DGND1 on Top Layer "NONET_L-01_P-001" (solid, remove dead copper, pour order 5): 70,50 0,50 0,0 70,0
AGND on Top Layer "NONET_L-01_P-001" (solid, remove dead copper, pour order 4): 70,36.75 50.25,36.75 47.75,34.25 47.75,27.5 50.5,24.75 50.5,14.5 49.4,13.4 48.6,13.4 45.6,16.4 45.5,16.4 42.6,13.5 45.55,10.55 46.4,11.4 47.5,10.3 48.4,10.3 51.2,7.5 51.2,4.1 51.9,3.4 61.5,3.4 61.5,6.2 63.6,8.3 70,8.3

## Keep-outs
Keep-Out Layer:
  lines w0.1: 47.575,27.725 50.35,24.95 50.35,14.725 50.125,14.5 ; 47.606,10.325 48.325,10.325 51.225,7.425 51.225,4.075 51.85,3.45 61.35,3.45 61.35,6.25 63.55,8.45 69.85,8.45 ; 47.75,33.25 47.75,34.325 50.125,36.7 69.75,36.7 ; 0,0 0,50 70,50 70,0 0,0

## Text inside footprints (layer, text, board x,y; h text height)
DD1: Top Overlay "*" at 35.715,41.127 h1.27 r270; Top 3D Body "*" at 35.715,39.679 h1.27 r270
DD4: Top Overlay "*" at 43.024,31.215 h1.27; Top 3D Body "*" at 44.472,31.215 h1.27
XS2: Mechanical 2 "PCB Edge" at 0.344,23.705 h0.61 r270